# Altium PCB Arduino_Leonardo-REV3b.PcbDoc
Units mil, origin at the board's own origin, x right, y up, seen from the top; angles counter-clockwise.
Board outline 2700 x 2100 mil, 2 copper layers (Top, Bottom), stack 61.811 mil thick; 51 components, 53 nets, 275 pads, 91 vias.
Unrouted connection lines stored in the file: 3.
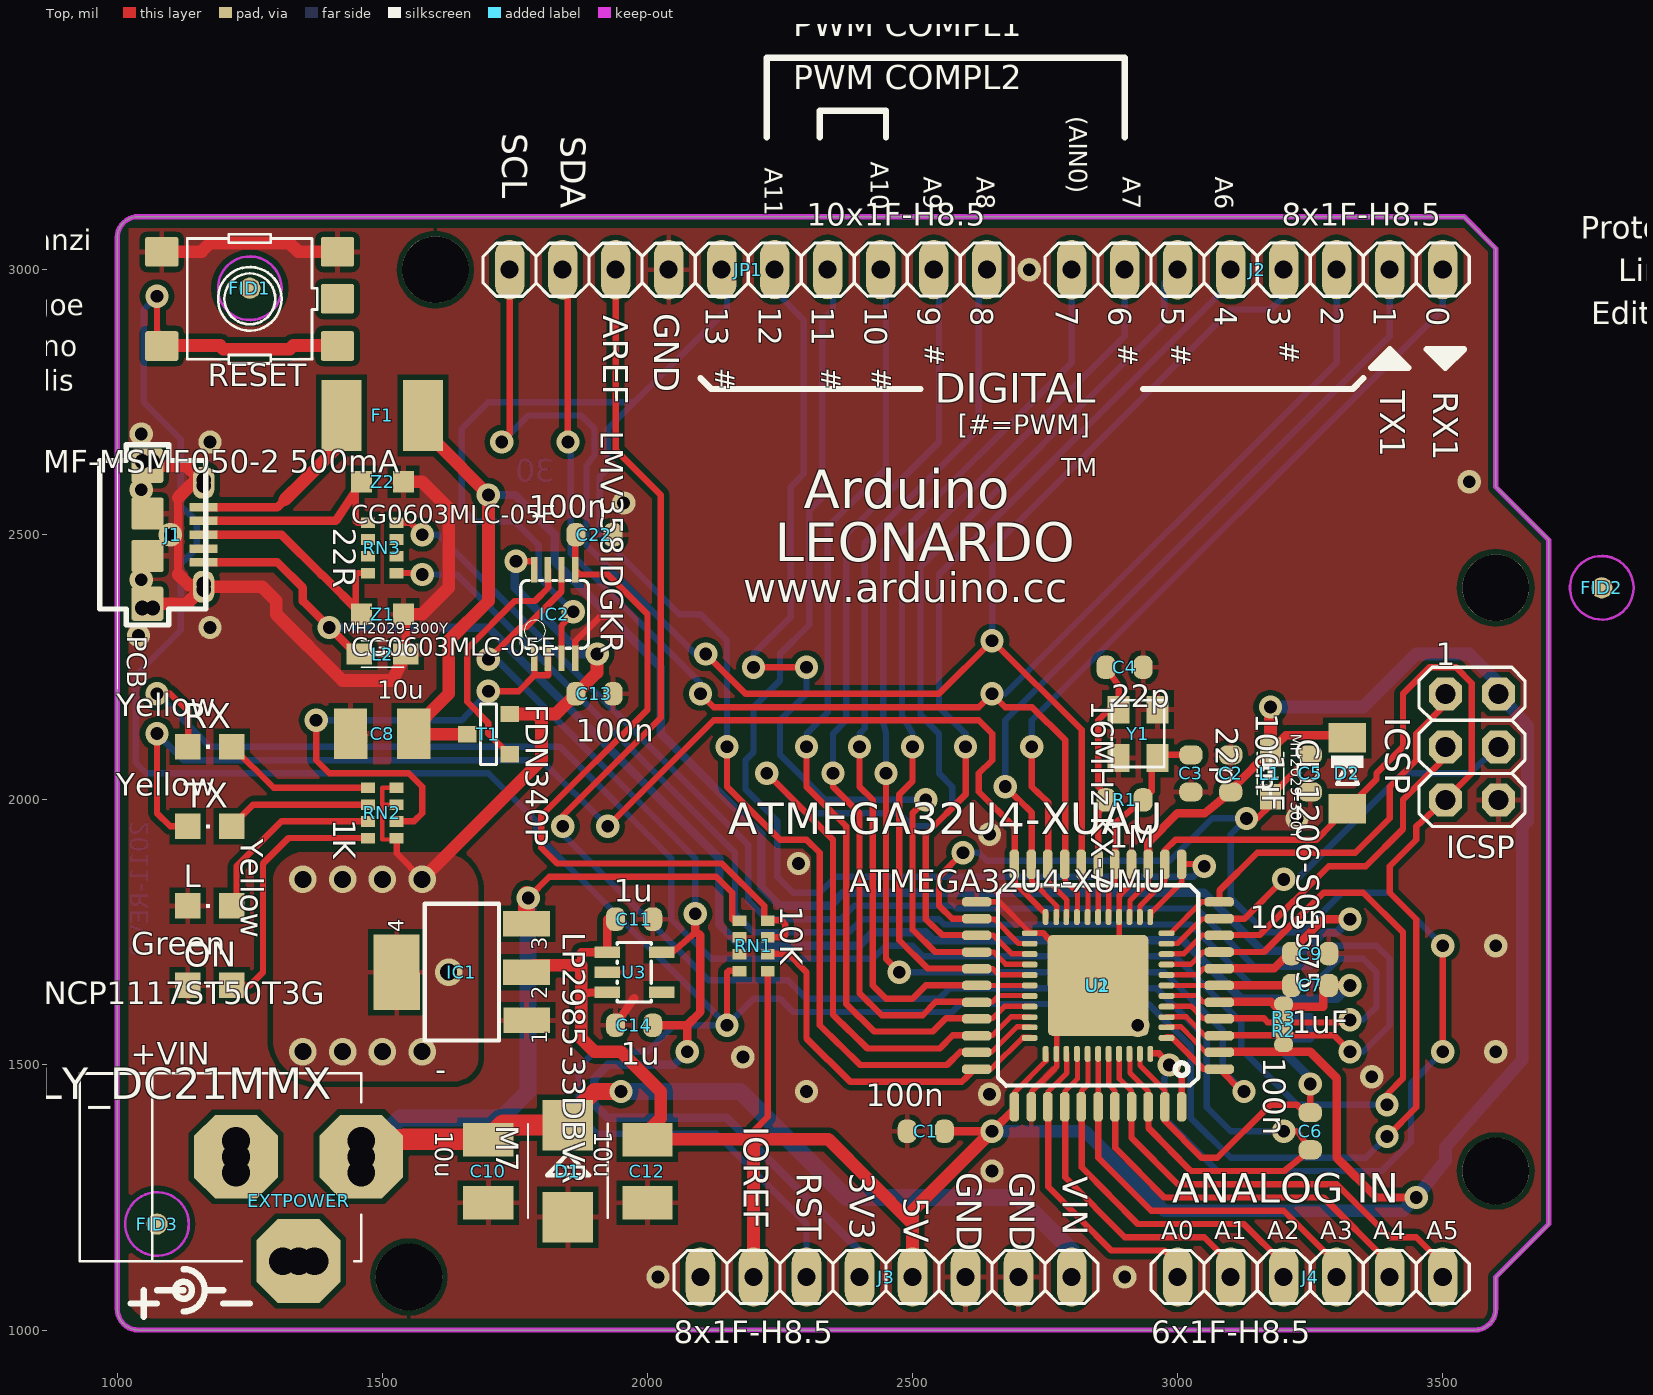
[diagram p0: Top view]
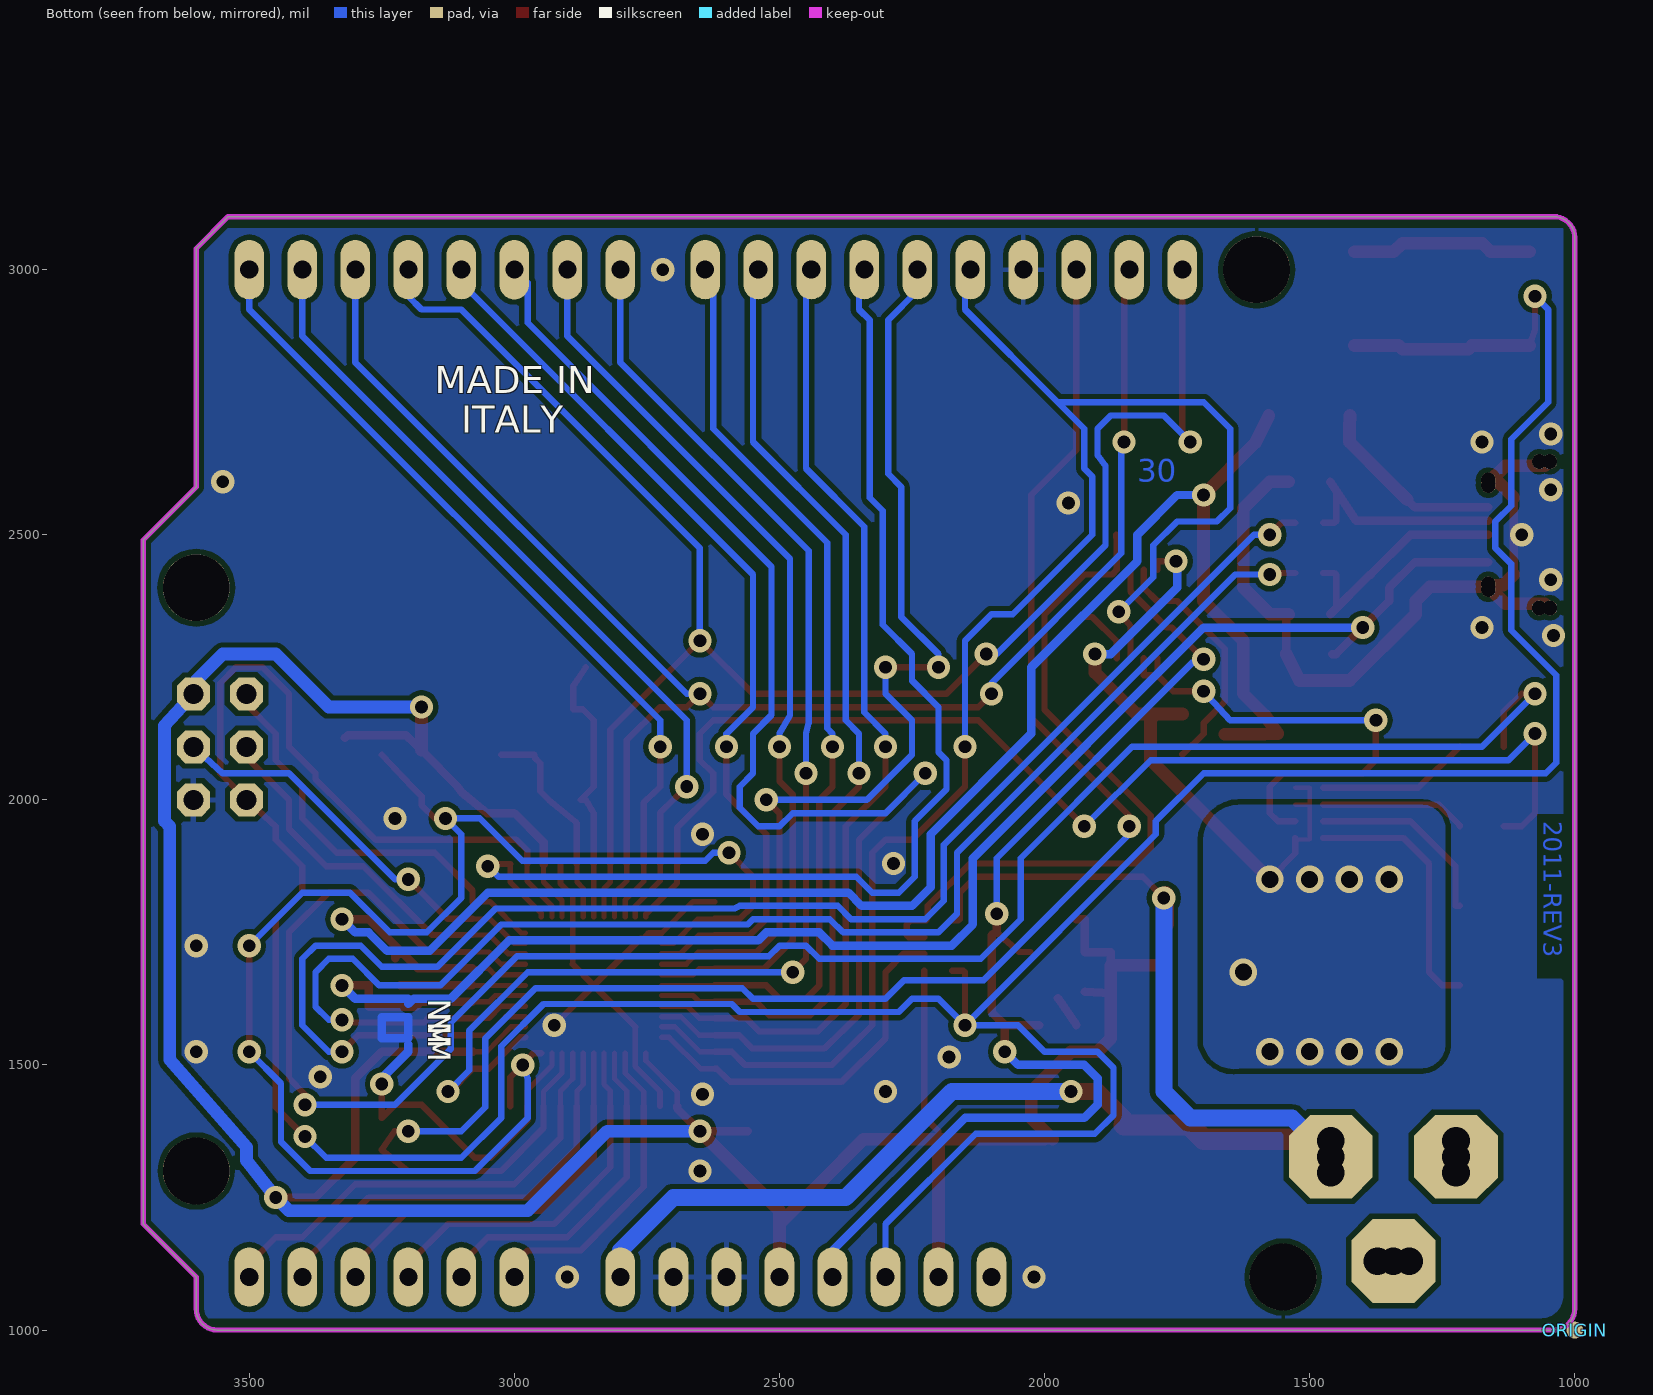
[diagram p1: Bottom view, seen from below]

## Layer stack, top to bottom
Top Solder: solder mask 0.4, Solder Resist, Dk 3.5
Top: signal copper 1.378
Dielectric 1: core 59.0551, FR-4, Dk 4.8
Bottom: signal copper 1.378
Bottom Solder: solder mask 0.4, Solder Resist, Dk 3.5

## Board outline
1040,3100 3540,3100 3600,3040 3600,2590 3700,2490 3700,1200 3600,1100 3600,1040 cw(c3560.5,1039.5) 3561,1000 1040,1000 cw(c1040,1040) 1000,1040 1000,3061 cw(c1039.5,3060.5)

## Design rules (kind name [scope] priority, off if disabled: settings)
Clearance [All] p1: gap=10 except(0: SMDPad-SMDPad SMDPad-THPad SMDPad-Via; 8: THPad-THPad; 12: THPad-Via Via-Via)
Clearance "Clearance (Same Net)" [All] p2: gap=0 except(8: SMDPad-SMDPad SMDPad-THPad SMDPad-Via)
HoleSize HoleSize_1 [All] p1: absolutevalues=TRUE maxlimit=100000 minlimit=22 maxpercent=80.000 minpercent=20.000
HoleSize [All] p2: absolutevalues=TRUE maxlimit=100 minlimit=1 maxpercent=80.000 minpercent=20.000
HoleToHoleClearance mdViaViaSameLayer [All] p1: gap=8 allowstackedmicrovias=TRUE
HoleToHoleClearance [All] p2: gap=10 allowstackedmicrovias=TRUE
PasteMaskExpansion mlMinCreamFrame [All] p1: expansion=-20
PasteMaskExpansion [All] p2: expansion=0
PolygonConnect ThermalVias [IsVia] p1: connectstyle=Direct reliefconductorwidth=10 reliefentries=4 polygonreliefangle="90 Angle" airgapwidth=10
PolygonConnect [All] p2: connectstyle=Relief reliefconductorwidth=10 reliefentries=4 polygonreliefangle="90 Angle" airgapwidth=10
RoutingVias [All] p1: holewidth=28 width=50 viastyle="Through Hole" minholewidth=28 minwidth=50 maxholewidth=28 maxwidth=50
SilkToSilkClearance [All] p1 off: silktosilkclearance=10
SilkToSolderMaskClearance [IsPad] p1 off: minsilkscreentomaskgap=10 clearancetoexposedcopper=TRUE
SolderMaskExpansion mlMinStopFrame [All] p1: expansion=2
SolderMaskExpansion [All] p2: expansion=4
Width Width_1 [All] p1: maxlimit=100000 minlimit=10 preferedwidth=10
Width [All] p2: maxlimit=10 minlimit=10 preferedwidth=10
25 further rules are at their usual default settings.

## Components (designator, comment, footprint, x,y, rotation, side; value= is the part's Value field where it differs from the comment)
C1 "100n" C0603-ROUND 2525,1375 r180.01 top
C2 "100n" C0603-ROUND 3100,2050 r90.02 top
C3 "22p" C0603-ROUND 3025,2050 r90.02 top
C4 "22p" C0603-ROUND 2900,2250 r0 top
C5 "1uF" C0603-ROUND 3250,2050 r270 top
C6 "100n" C0603-ROUND 3250,1375 r270 top
C7 "1uF" C0603-ROUND 3250,1650 r0 top
C8 "10u" SMC_B 1500,2125 r180.01 top
C9 "100n" C0603-ROUND 3250,1710 r180.01 top
C10 "10u" SMC_B 1700,1300 r270 top
C11 "1u" C0603-ROUND 1975,1775 r180.01 top
C12 "10u" SMC_B 2000,1300 r270 top
C13 "100n" C0603-ROUND 1900,2200 r0 top
C14 "1u" C0603-ROUND 1975,1575 r0 top
C22 "100n" C0603-ROUND 1900,2500 r180.01 top
D1 "M7" SMB 1850,1300 r270 top
D2 "CD1206-S01575" MINIMELF 3320,2050 r270 top
EXTPOWER "POWERSUPPLY_DC21MMX" POWERSUPPLY_DC-21MM 1210,1330 r90.02 top
F1 "MF-MSMF050-2 500mA" L1812 1500,2725 r180.01 top
FID1 "" FIDUCIA-MOUNT 1250,2965 r0 top
FID2 "" FIDUCIA-MOUNT 3800,2400 r0 top
FID3 "" FIDUCIA-MOUNT 1075,1200 r0 top
IC1 "NCP1117ST50T3G" SOT223 1650,1675 r90.02 top
IC2 "LMV358IDGKR" MSOP08 1825,2350 r0 top
ICSP "ICSP" 2X03 3555,2100 r270 top
J1 "" CON2_USB_MICRO_B_AT 1057,2500 r270 top
J2 "8x1F-H8.5" 1X08 3150,3000 r180.01 top
J3 "8x1F-H8.5" 1X08 2450,1100 r0 top
J4 "6x1F-H8.5" 1X06 3250,1100 r0 top
JP1 "10x1F-H8.5" 1X10 2190,3000 r180.01 top
L "Yellow" CHIPLED_0805 1175,1800 r90.02 top
L1 "MH2029-300Y" 0805 3175,2050 r270 top
L2 "MH2029-300Y" 0805 1500,2275 r0 top
ON "Green" CHIPLED_0805 1175,1650 r90.02 top
ORIGIN "" TP-SP 1000,1000 r0 top
R1 "1M" R0603-ROUND 2900,2000 r0 top
R2 "NM" R0402 3200,1564 r89.98 bottom
R3 "NM" R0402 3200,1589 r89.98 bottom
RESET "" TS42 1250,2945 r180.01 top
RN1 "10K" CAY16 2200,1725 r270 top
RN2 "1K" CAY16 1500,1975 r90.02 top
RN3 "22R" CAY16 1500,2475 r90.02 top
RX "Yellow" CHIPLED_0805 1175,2100 r90.02 top
T1 "FDN340P" SOT-23 1700,2125 r270 top
TX "Yellow" CHIPLED_0805 1175,1950 r90.02 top
U1 "ATMEGA32U4-XUMU" QFN44ML7X7 2850,1650 r180.01 top
U2 "ATMEGA32U4-XUAU" TQFP44-PAD 2850,1650 r180.01 top
U3 "LP2985-33DBVR" SOT23-DBV 1975,1675 r270 top
Y1 "16MHz KX-7" CRYSTAL-3.2-2.5 2925,2125 r270 top
Z1 "CG0603MLC-05E" CT/CN0603 1500,2350 r0 top
Z2 "CG0603MLC-05E" CT/CN0603 1500,2600 r0 top

## Footprints (in the part's own frame and the unit in brackets; to place one, negate y for a bottom-side part, rotate by r counter-clockwise, add the part's x,y. Pads: shape width x height; smd on the part's side, far side on the other; paste and mask are expansions set on the pad)
1X06 [mil] "1X06"
  oval 56x112 hole 34: 1(-250,0) 2(-150,0) 3(-50,0) 4(50,0) 5(150,0) 6(250,0)
  silkscreen extent -300,-50 300,50
1X08 [mil] "1X08"
  oval 56x112 hole 34: 1(-350,0) 2(-250,0) 3(-150,0) 4(-50,0) 5(50,0) 6(150,0) 7(250,0) 8(350,0)
  silkscreen extent -400,-50 400,50
1X10 [mil] "1X10"
  oval 56x112 hole 34: 1(-450,0) 2(-350,0) 3(-250,0) 4(-150,0) 5(-50,0) 6(50,0) 7(150,0) 8(250,0) 9(350,0) 10(450,0)
  silkscreen extent -500,-50 500,50
2X03 [mil] "2X03"
  oct 62x62 hole 38: 1(-100,-50) 2(-100,50) 3(0,-50) 4(0,50) 5(100,-50) 6(100,50)
  silkscreen extent -150,-100 150,100
0805 [mil] "0805"
  rect 48x40 smd: 1(-43.31,0) 2(44,0)
  silkscreen extent -51,-25 48,25
C0603-ROUND [mil] "C0603-ROUND"
  rrect80% 36x44 smd: 1(-35,0) 2(35,0)
CAY16 [mil] "CAY16"
  rect 20x26 smd: 1(-47.24,-26.57) 2(-15.75,-26.57) 3(16,-26.57) 4(48,-26.57) 5(48,27) 6(16,27) 7(-15.75,27) 8(-47.24,27)
CHIPLED_0805 [mil] "CHIPLED_0805"
  rect 48x48 smd: A(0,-41.34) C(0,42)
  silkscreen extent -4,0 4,8
CON2_USB_MICRO_B_AT [mil] "CON2_USB_MICRO_B_AT"
  round 28 hole 28: 1(-138,-10) 1(-138,10) 1(-103,106) 1(-93,106) 1(93,106) 1(103,106) 1(138,-10) 1(138,10)
  rrect10% 16x53 smd: P1(-52,106) P2(-26,106) P3(0,106) P4(26,106) P5(52,106)
  rrect20% 65x61 smd: S1(-130,0) S2(130,0)
  rrect80% 60x40 smd: S3(-98,106) S4(98,106)
  rrect10% 60x60 smd: S5(-40,0) S6(40,0)
  silkscreen extent -170,-90 290,110
CRYSTAL-3.2-2.5 [mil] "CRYSTAL-3.2-2.5"
  rect 52x42 smd: 1(-45.28,-36.42) 2(46,-36.42) 3(46,37) 4(-45.28,37)
  silkscreen extent -63,-49 63,50
CT/CN0603 [mil] "CT/CN0603"
  rect 40x40 smd: 1(-39.37,0) 2(40,0)
FIDUCIA-MOUNT [mil] "FIDUCIA-MOUNT"
  rrect100% 40x40 smd: P$1(0,0)
  Top keep-out circle w5: c0,0 r60
L1812 [mil] "L1812"
  rect 75x134 smd: 1(-76.77,0) 2(77,0)
MINIMELF [mil] "MINIMELF"
  rect 56x71 smd: A(67,0) C(-66.93,0)
  silkscreen extent -34,-31 20,31
MSOP08 [mil] "MSOP08"
  rect 12x48 smd: 1(-38.43,-83.19) 2(-12.83,-83.19) 3(13,-83.19) 4(39,-83.19) 5(39,84) 6(13,84) 7(-12.83,84) 8(-38.43,84)
  silkscreen extent -64,-64 64,64
POWERSUPPLY_DC-21MM [mil] "POWERSUPPLY_DC-21MM"
  oct 158x158 hole 52: 1(-200,-132) 2(-3,-250) 3(-3,-14)
  round 78 hole 52: 4(-200,-162) 5(-200,-102) 6(-33,-14) 7(27,-14) 8(-33,-250) 9(27,-250)
  silkscreen extent -200,-250 154,281
QFN44ML7X7 [mil] "QFN44ML7X7"
  rrect80% 30x11 smd: 1(-128.94,99) 2(-128.94,79) 3(-128.94,60) 4(-128.94,40) 5(-128.94,20) 6(-128.94,0) 7(-128.94,-19.69) 8(-128.94,-39.37) 9(-128.94,-59.06) 10(-128.94,-78.74) 11(-128.94,-98.43) 23(129,-98.43) 24(129,-78.74) 25(129,-59.06) 26(129,-39.37) 27(129,-19.68) 28(129,0) 29(129,20) 30(129,40) 31(129,60) 32(129,79) 33(129,99)
  rrect80% 11x30 smd: 12(-98.43,-128.94) 13(-78.74,-128.94) 14(-59.06,-128.94) 15(-39.37,-128.94) 16(-19.68,-128.94) 17(0,-128.94) 18(20,-128.94) 19(40,-128.94) 20(60,-128.94) 21(79,-128.94) 22(99,-128.94) 34(99,129) 35(79,129) 36(60,129) 37(40,129) 38(20,129) 39(0,129) 40(-19.69,129) 41(-39.37,129) 42(-59.06,129) 43(-78.74,129) 44(-98.43,129)
  rrect10% 190x190 smd: EXP(0,0)
R0402 [mil] "R0402"
  rrect90% 28x36 smd far side: 1(-25.59,0) 2(26,0)
R0603-ROUND [mil] "R0603-ROUND"
  rrect80% 36x44 smd: 1(-35,0) 2(35,0)
SMB [mil] "SMB"
  rect 95x95 smd: A(87,0) C(-86.61,0)
  silkscreen extent -89,-75 89,75
SMC_B [mil] "SMC_B"
  rect 63x95 smd: +(-59.06,0) -(60,0)
SOT23-DBV [mil] "SOT23-DBV"
  rect 22x48 smd: 1(-37.4,-51.18) 2(0,-51.18) 3(38,-51.18) 4(38,52) 5(-37.4,52)
  silkscreen extent -56,-32 56,32
SOT223 [mil] "SOT223"
  rect 48x88 smd: 1(-91,-122) 2(0,-122) 3(91,-122)
  rect 142x87 smd: 4(0,123)
  silkscreen extent -129,-70 129,70
SOT-23 [mil] "SOT-23"
  rect 31x35 smd: 1(1,-40) 2(-37,40) 3(39,40)
  silkscreen extent -56,-15 58,15
TP-SP [mil] "TP-SP"
  rrect100% 32x32 smd far side: X(0,0)
TQFP44-PAD [mil] "TQFP44-PAD"
  rrect80% 56x18 smd: 1(-228.35,158) 2(-228.35,126) 3(-228.35,95) 4(-228.35,63) 5(-228.35,32) 6(-228.35,0) 7(-228.35,-31.5) 8(-228.35,-62.99) 9(-228.35,-94.49) 10(-228.35,-125.98) 11(-228.35,-157.48) 23(229,-157.48) 24(229,-125.98) 25(229,-94.49) 26(229,-62.99) 27(229,-31.5) 28(229,0) 29(229,32) 30(229,63) 31(229,95) 32(229,126) 33(229,158)
  rrect80% 18x56 smd: 12(-157.48,-228.35) 13(-125.98,-228.35) 14(-94.49,-228.35) 15(-62.99,-228.35) 16(-31.5,-228.35) 17(0,-228.35) 18(32,-228.35) 19(63,-228.35) 20(95,-228.35) 21(126,-228.35) 22(158,-228.35) 34(158,229) 35(126,229) 36(95,229) 37(63,229) 38(32,229) 39(0,229) 40(-31.5,229) 41(-62.99,229) 42(-94.49,229) 43(-125.98,229) 44(-157.48,229)
  rrect100% 40x40 smd: P$1(0,0)
  silkscreen extent -189,-189 189,189
TS42 [mil] "TS42"
  rrect15% 63x56 smd: 1(-165.35,89) 2(166,89) 3(-165.35,-88.58) 4(166,-88.58) 5(-165.35,0)
  silkscreen extent -127,-122 118,122

## Part data
C1 C2 C3 C4 C5 C6 C7 C9 C11 C13 C14 C22: library part C0603-ROUND
C8 C10 C12: library part SMC_B
D1: library part SMB
D2: library part MINIMELF
EXTPOWER: library part POWERSUPPLY_DC-21MM
F1: library part L1812
FID1 FID2 FID3: library part FIDUCIA-MOUNT
IC1: library part SOT223
IC2: library part MSOP08
ICSP: library part 2X03
J1: library part CON2_USB_MICRO_B_AT
J2 J3: library part 1X08
J4: library part 1X06
JP1: library part 1X10
L ON RX TX: library part CHIPLED_0805
L1 L2: library part 0805
ORIGIN: library part TP-SP
R1: library part R0603-ROUND
R2 R3: library part R0402
RESET: library part TS42
RN1 RN2 RN3: library part CAY16
T1: library part SOT-23
U1: library part QFN44ML7X7
U2: library part TQFP44-PAD
U3: library part SOT23-DBV
Y1: library part CRYSTAL-3.2-2.5
Z1 Z2: library part CT/CN0603

## Free pads (board coordinates)
  round 126 hole 126: 1(1550,1100) 1(1600,3000) 1(3600,1300) 1(3600,2400)

## Via types
v1: diameter 44/44 (per signal layer), hole 24, Top to Bottom, 82 vias
v2: diameter 52/52 (per signal layer), hole 32, Top to Bottom, 9 vias

## Nets (pads, with @x,y where several pads share a name; then routed paths per layer and width w, separated by ;. In a path a pad name is that pad's centre, name@x,y a point inside that pad or via, vN(x,y) a via of type N, cw(c..) or ccw(c..) an arc to the next point about the centre after c; other vN are vias at no path point)
5-GND: RESET.5
+3V3: C14.2 IC2.6 J3.4 U3.5 | length 2210.5
  Top w12: v1(1700,2265) 1760,2325 1770,2325 1838,2393 IC2.6 ; U3.5@2027,1713 2048,1713 2090,1750
  Top w16: C14.2 2075,1575 ; v1(2075,1525) 2075,1575 ; v1(2090,1785) 2090,1750 2100,1745 2100,1600 2075,1575
  Bottom w12: v1(1700,2265) 1705,2265 1710,2260 1720,2260 2090,1890 v1(2090,1785)
  Bottom w16: v1(2075,1525) 2050,1500 1925,1500 1900,1475 1900,1425 1925,1400 2150,1400 2400,1150 J3.4
+5V: C1.1 C2.1 C11.2 C12.+ C13.1 D2.C IC1.2 IC1.4 IC2.8 ICSP.2 J3.2 J3.5 L1.1 RN1.5 RN2.1 RN2.3 RN2.4 T1.2 U1.2 U1.14 U1.34 U2.2 U2.14 U2.34 U3.1 U3.3 | length 7583.9
  Top w8: RN2.1@1524,1925 1500,1925 1500,1991 ; RN2.3@1527,1991 1500,1991 ; RN2.4@1527,2023 1500,2023 1500,1991
  Top w10: U2.34@2693,1422 2693,1449 2752,1508 U1.34@2752,1522 ; U1.14@2910,1779 2910,1810 2945,1845 U2.14@2945,1879 ; U1.2@2979,1572 3006,1572 3052,1525 U2.2@3078,1525
  Top w12: RN2.1@1524,1925 1527,1928 1527,1899 v2(1575,1850) ; v1(1752,2450) 1787,2450 IC2.8@1787,2434 ; 2200,1360 2200,1375 2227,1402 RN1.5@2227,1678 ; U2.2@3078,1525 U2.2@3079,1525
  Top w16: 1875,1635 U3.3@1924,1638 ; 1875,1688 1875,1713 1924,1713 1924,1775 C11.2 ; C12.+@1985,1360 C12.+@2000,1360 ; C1.1 v1(2650,1375) 2693,1418 U2.34@2693,1422 ; U2.14@2945,1879 2945,1920 3000,1975 3051,1975 C2.1 3107,2025 3175,2094 3204,2122 3314,2122 3315,2120 D2.C@3320,2117 ; U2.2@3078,1525 3250,1525 3300,1475 3300,1325 3375,1250 v1(3450,1250)
  Top w24: v2(1575,1850) 1800,2075 1800,2152 1790,2162 ; T1.2 1790,2162 ; IC1.2 1785,1688 1875,1688 1875,1635 1875,1550 1900,1525 1950,1525 2025,1450 2025,1400 C12.+@1985,1360 ; v1(1905,2275) 1905,2240 C13.1 1827,2162 1790,2162 ; C12.+@2000,1360 2200,1360 ; J3.2 2200,1360 ; J3.5 2500,1200 ; v1(2650,1375) 2500,1225 2500,1200 ; L1.1@3175,2094 v1(3175,2175) ; 2200,1360 2341,1360 2500,1200
  Bottom w16: v1(1752,2450) 1750,2439 1750,2400 1875,2275 v1(1905,2275)
  Bottom w24: v1(2650,1375) 2825,1375 2975,1225 3425,1225 v1(3450,1250) 3505,1320 3505,1345 3650,1510 3650,1950 3660,1960 3660,2140 ICSP.2 3600,2225 3550,2275 3450,2275 3350,2175 v1(3175,2175)
  other v2: 1350,1525 1425,1525 1500,1525 1575,1525 1625,1675 1350,1850 1425,1850 1500,1850
A0: J4.1 U1.36 U2.36 | length 595.9
  Top w10: U2.36@2756,1422 2756,1450 2791,1485 U1.36@2791,1522
  Top w12: U2.36@2756,1422 2756,1270 2875,1150 2975,1150 3000,1125 J4.1
A1: J4.2 U1.37 U2.37 | length 648.3
  Top w10: U2.37@2788,1422 2788,1451 2811,1474 U1.37@2811,1522
  Top w12: U2.37@2788,1422 2788,1288 2900,1175 3050,1175 3100,1125 J4.2
A2: J4.3 U1.38 U2.38 | length 701.7
  Top w10: U2.38@2819,1422 2819,1451 2831,1463 U1.38@2831,1522
  Top w12: U2.38@2819,1422 2819,1307 2925,1200 3125,1200 3200,1125 J4.3
A3: J4.4 U1.39 U2.39 | length 754.8
  Top w10: U2.39@2850,1422 U1.39@2850,1522
  Top w12: U2.39@2850,1422 2850,1325 2950,1225 3200,1225 3300,1125 J4.4
A4: J4.5 U1.40 U2.40 | length 817
  Top w10: U1.40@2870,1522 2870,1463 2882,1451 U2.40@2882,1422
  Top w12: U2.40@2882,1422 2882,1344 2975,1250 3275,1250 3400,1125 J4.5
A5: J4.6 U1.41 U2.41 | length 879.4
  Top w10: U1.41@2890,1522 2890,1474 2913,1451 U2.41@2913,1422
  Top w12: U2.41@2913,1422 2913,1363 3000,1275 3300,1275 3400,1175 3450,1175 3500,1125 J4.6
AGND: C6.1 R2.1 U1.43 U2.43 | length 661.2
  Top w10: U1.43@2929,1522 2929,1499 2976,1452 U2.43@2976,1422
  Top w12: U2.43@2976,1422 2976,1395 3045,1325 3075,1325 3175,1425 3225,1425 3250,1400 C6.1 v1(3250,1464)
  Bottom w16: 3200,1539 3200,1525 3250,1475 v1(3250,1464)
AREF: C6.2 JP1.8 U1.42 U2.42 | length 3438.6
  Top w10: U1.42@2910,1522 2910,1485 2945,1450 U2.42@2945,1422
  Top w12: v1(1840,1950) 1840,1970 2025,2155 2025,2575 1940,2660 JP1.8 ; U2.42@2945,1422 2945,1381 3025,1300 3201,1300 C6.2 3226,1375 v1(3200,1375)
  Bottom w12: v1(1840,1950) 1840,1935 2115,1660 2265,1660 2300,1625 2550,1625 2570,1645 2960,1645 3055,1550 3055,1420 3100,1375 v1(3200,1375)
AVCC: C5.1 L1.2 U1.24 U1.44 U2.24 U2.44 | length 2895.5
  Top w10: U2.24@2622,1776 2623,1775 2654,1775 2700,1729 2716,1729 U1.24@2722,1729
  Top w12: v1(2595,1900) 2550,1855 2550,1800 2575,1776 U2.24@2622,1776 ; U1.44@2949,1522 2965,1522 v1(2984,1500) 3008,1477 U2.44@3008,1422 ; v1(3130,1965) 3150,1965 3175,1990 3175,2007 3193,2025 C5.1 ; v1(3500,1525) v1(3500,1725)
  Bottom w12: v1(2595,1900) 2625,1900 2640,1885 2985,1885 3065,1965 v1(3130,1965) 3100,1935 3100,1815 3165,1750 3235,1750 3310,1825 3400,1825 v1(3500,1725) ; v1(2984,1500) 2975,1475 2975,1400 3075,1300 3385,1300 3440,1355 3440,1465 v1(3500,1525)
CMP: C22.2 IC2.5 RN1.7 RN1.8 | length 1351.4
  Top w12: C22.2 1865,2495 1864,2494 IC2.5 1872,2425 1925,2425 2000,2350 2000,2170 1800,1970 1800,1910 1830,1880 2140,1880 2220,1800 2220,1779 RN1.8@2227,1773 ; RN1.8@2223,1773 RN1.8@2227,1773 ; RN1.7@2227,1741 2256,1741 2260,1745 2260,1765 2253,1773 RN1.8@2227,1773
D0/RX: J2.1 U1.20 U2.20 | length 1569.7
  Top w10: U2.20@2756,1879 2756,1846 2791,1811 U1.20@2791,1779
  Top w12: v1(2725,2100) 2725,2025 2756,1995 U2.20@2756,1879
  Bottom w12: v1(2725,2100) 2725,2150 3500,2925 J2.1@3500,3000
D1/TX: J2.2 U1.21 U2.21 | length 1561.8
  Top w10: U2.21@2725,1879 2725,1847 2772,1800 U1.21@2772,1779
  Top w12: v1(2675,2025) 2725,1976 U2.21@2725,1879
  Bottom w12: v1(2675,2025) 2675,2150 3400,2875 J2.2
D2/SDA: J2.3 JP1.9 U1.19 U2.19 | length 3079.6
  Top w10: U2.19@2788,1879 2788,1847 2811,1824 U1.19@2811,1779
  Top w12: JP1.9@1840,3000 1850,2990 v1(1850,2675) ; v1(2100,2200) 2125,2175 2625,2175 v1(2650,2200) 2675,2175 2725,2175 2788,2113 U2.19@2788,1879
  Bottom w12: v1(1850,2675) 1850,2670 1855,2665 1855,2465 2100,2220 v1(2100,2200) ; v1(2650,2200) 2675,2200 3300,2825 J2.3
D3/SCL: J2.4 JP1.10 U1.18 U2.18 | length 3252.7
  Top w10: U2.18@2819,1879 2819,1845 2831,1833 U1.18@2831,1779
  Top w12: v1(1725,2675) 1740,2690 JP1.10@1740,3000 ; v1(2110,2275) 2185,2200 2550,2200 v1(2650,2300) 2819,2132 U2.18@2819,1879
  Bottom w12: v1(1725,2675) 1775,2725 1875,2725 1900,2700 1900,2650 1885,2630 1885,2480 2090,2275 v1(2110,2275) ; v1(2650,2300) 2650,2475 3100,2925 3175,2925 3200,2950 J2.4
D4: J2.5 U1.25 U2.25 | length 1728.2
  Top w10: U2.25@2622,1745 2652,1745 2687,1710 U1.25@2722,1710
  Top w12: v1(2600,2100) 2600,2010 2525,1935 2525,1775 2556,1745 U2.25@2622,1745
  Bottom w12: v1(2600,2100) 2600,2125 2550,2175 2550,2425 3100,2975 J2.5
D5*: J2.6 U1.31 U2.31 | length 2576.5
  Top w10: U2.31@2622,1556 2651,1556 2686,1591 U1.31@2722,1591
  Top w12: v1(2225,2050) 2350,1925 2350,1595 2415,1531 2551,1531 2576,1556 U2.31@2622,1556
  Bottom w12: v1(2225,2050) 2300,1975 2475,1975 2500,1950 2540,1950 2575,1985 2575,2025 2550,2050 2550,2125 2515,2160 2515,2440 2975,2900 2975,2975 J2.6
D6*: J2.7 U1.27 U2.27 | length 1728.3
  Top w10: U2.27@2622,1682 2651,1682 2663,1670 U1.27@2722,1670
  Top w12: v1(2500,2100) 2500,2035 2475,2010 2475,1735 2529,1682 U2.27@2622,1682
  Bottom w12: v1(2500,2100) 2500,2125 2480,2160 2480,2455 2900,2875 J2.7
D7: J2.8 U1.1 U2.1 | length 2458.7
  Top w12: v1(2450,2050) 2450,1700 v1(2475,1675) ; U1.1@2979,1552 2989,1552 3048,1493 3079,1493 3121,1450 v1(3125,1450)
  Bottom w12: v1(2450,2050) 2450,2125 2445,2145 2445,2470 2800,2825 J2.8@2800,3000 ; v1(2475,1675) 2975,1675 3085,1565 3085,1490 v1(3125,1450)
D+: J1.P3 RN3.8 Z1.1 | length 464
  Top w12: Z1.1@1461,2350 1450,2365 1450,2425 1453,2428 RN3.8@1474,2428
  Top w16: J1.P3 1310,2500 1385,2425 1386,2425 Z1.1@1461,2350
D-: J1.P2 RN3.5 Z2.1 | length 441.2
  Top w12: Z2.1@1461,2600 1450,2586 1450,2525 1453,2523 RN3.5@1474,2523
  Top w16: J1.P2 1412,2526 Z2.1@1461,2600
GATE_CMD: IC2.7 T1.3 | length 467.4
  Top w12: T1.3 1739,2086 1700,2125 1700,2145 1660,2185 1660,2285 1750,2375 1788,2375 1813,2400 IC2.7@1813,2434
GND: C1.2 C2.2 C3.1 C4.2 C5.2 C8.- C9.1 C10.- C11.1 C12.- C13.2 C14.1 C22.1 D1.A EXTPOWER.1 EXTPOWER.3 IC1.1 IC2.4 ICSP.6 J1.S1 J1.S2 J1.S3 J1.S4 J1.S5 J1.S6 J3.6 J3.7 JP1.7 L2.2 L.C ON.C R2.2 R3.1 RESET.3 RESET.4 RN1.2 RN1.3 U1.15 U1.23 U1.35 U1.EXP U2.15 U2.23 U2.35 U2.P$1 U3.2 Y1.2 Y1.4 Z1.2 Z2.2 | length 3071.5
  Top w10: U2.23@2622,1808 2663,1808 U1.23@2722,1749
  Top w11: U1.23@2722,1749 2746,1749 ; U2.35@2725,1422 2725,1450 2772,1497 2772,1522 U1.EXP@2772,1572 ; U1.EXP@2890,1690 2890,1779 2890,1819 2913,1842 U2.15@2913,1879
  Top w12: J1.S4@1160,2405 J1.S4 ; IC2.4@1864,2267 1864,2299 1910,2345 1925,2345 ; 2746,1749 2756,1738 2762,1738 U2.P$1 ; U1.EXP@2772,1572 U2.P$1 ; U1.EXP@2890,1690 U2.P$1 ; v1(2925,1575) U2.P$1
  Top w16: 1115,2425 1115,2570 ; Z1.2 1544,2347 L2.2 ; C14.1 1975,1626
  Top w24: J1.S2 1131,2370 J1.S4 1273,2402 1300,2375 1300,2350 1425,2225 1519,2225 L2.2 ; J1.S1 1131,2630 J1.S3 1143,2598 1115,2570 ; RESET.4@1085,3034 1159,3034 1175,3050 1325,3050 1342,3034 RESET.3@1416,3034 ; 1115,2425 1135,2405 J1.S4@1160,2405 ; Z1.2 1575,2350 1625,2400 1625,2550 1575,2600 Z2.2
  Bottom w16: 3200,1550 3200,1564 3200,1590 3250,1590 3250,1550 3200,1550
  other v1: 2020,1100 2900,1100 2650,1300 2645,1445 2300,1450 3366,1478 2180,1515 3600,1525 3600,1725 2285,1880 2645,1935 3225,1965 1040,2310 1175,2325 1045,2415 1100,2500 1955,2560 1045,2585 3550,2600 1175,2675 1045,2690 2720,3000
HWB: RN1.6 U1.33 U2.33 | length 703.3
  Top w10: U2.33@2622,1493 2649,1493 2708,1552 U1.33@2722,1552
  Top w12: RN1.6@2227,1710 2266,1710 2300,1675 2300,1550 2383,1468 2593,1468 2600,1475 2618,1493 U2.33@2622,1493
IO8: JP1.1 U1.28 U2.28 | length 1777.5
  Top w10: U2.28@2622,1650 U1.28@2722,1650
  Top w12: v1(2400,2100) 2400,2025 2425,2000 2425,1650 2450,1625 2500,1625 2525,1650 U2.28@2622,1650
  Bottom w12: v1(2400,2100) 2400,2125 2410,2135 2410,2485 2625,2700 2625,2985 JP1.1@2640,3000
IO9*: JP1.2 U1.29 U2.29 | length 1826.7
  Top w10: U2.29@2622,1619 2651,1619 2663,1631 U1.29@2722,1631
  Top w12: v1(2350,2050) 2350,2025 2400,1975 2400,1635 2442,1594 2519,1594 2544,1619 U2.29@2622,1619
  Bottom w12: v1(2350,2050) 2350,2125 2375,2150 2375,2500 2550,2675 2550,2990 JP1.2@2540,3000
IO10*: JP1.3 U1.30 U2.30 | length 1899.6
  Top w10: U2.30@2622,1588 2651,1588 2674,1611 U1.30@2722,1611
  Top w12: v1(2300,2100) 2300,2025 2375,1950 2375,1615 2428,1563 2538,1563 2563,1588 U2.30@2622,1588
  Bottom w12: v1(2300,2100) 2300,2125 2340,2165 2340,2515 2450,2625 2450,2965 JP1.3@2440,2975 ; JP1.3 JP1.3@2440,2975 ; JP1.3@2450,2950 2440,2960 JP1.3@2440,2975
IO11*: JP1.4 U1.12 U2.12 | length 2256.6
  Top w10: U1.12@2949,1779 2949,1786 3008,1845 U2.12@3008,1879
  Top w12: U2.12@3008,1879 3054,1879 v1(3050,1875)
  Bottom w12: JP1.4 2350,2990 2350,2925 2330,2905 2330,2570 2305,2545 2305,2330 2250,2275 2250,2225 2200,2175 2200,2090 2185,2075 2185,2020 2245,1960 2245,1855 2275,1825 2325,1825 2355,1855 3030,1855 v1(3050,1875)
IO12: JP1.5 U1.26 U2.26 | length 1912
  Top w10: U2.26@2622,1713 2653,1713 2676,1690 U1.26@2722,1690
  Top w12: v1(2200,2250) v1(2300,2250) ; v1(2525,2000) 2500,1975 2500,1755 2543,1713 U2.26@2622,1713
  Bottom w12: v1(2200,2250) 2200,2275 2270,2345 2270,2590 2295,2615 2295,2905 2240,2960 JP1.5 ; v1(2300,2250) 2300,2200 2250,2150 2250,2085 2335,2000 v1(2525,2000)
IO13*: IC2.3 JP1.6 U1.32 U2.32 | length 3128.2
  Top w10: U2.32@2622,1525 2650,1525 2697,1572 U1.32@2722,1572
  Top w12: IC2.3@1838,2267 1838,2328 v1(1860,2355) ; v1(2150,2100) 2150,2025 2250,1925 2300,1925 2325,1900 2325,1575 2401,1500 2565,1500 2590,1525 U2.32@2622,1525
  Bottom w12: v1(1860,2355) 1795,2420 1795,2480 1750,2525 1675,2525 1650,2550 1650,2700 1700,2750 1975,2750 ; JP1.6 2150,2990 2150,2925 1975,2750 ; v1(2150,2100) 2150,2300 2100,2350 2060,2350 1910,2500 1910,2610 1925,2625 1925,2700 1975,2750
LL: IC2.1 IC2.2 RN2.2 | length 938.7
  Top w12: v1(1375,2150) 1375,2075 1400,2050 1550,2050 1575,2025 1575,1975 1560,1960 RN2.2@1527,1960 ; v1(1700,2205) 1757,2205 1787,2235 ; IC2.1@1787,2267 1787,2235 ; IC2.2@1813,2267 1813,2235 1787,2235
  Bottom w12: v1(1375,2150) 1650,2150 v1(1700,2205)
MISO: ICSP.1 U1.11 U2.11 | length 801.3
  Top w10: U1.11@2979,1749 2987,1749 3046,1808 U2.11@3079,1808
  Top w12: U2.11@3079,1808 3079,1829 3150,1900 3335,1900 3400,1965 3400,2025 3450,2075 3450,2125 3505,2180 ICSP.1
MOSI: ICSP.4 U1.10 U2.10 | length 777.9
  Top w10: U1.10@2979,1729 3000,1729 3046,1775 U2.10@3079,1776
  Top w12: U2.10@3079,1776 3126,1776 v1(3200,1850)
  Bottom w12: v1(3200,1850) 3225,1850 3425,2050 3550,2050 ICSP.4
N$2: L.A RN2.7 | length 367.2
  Top w12: L.A@1217,1800 1225,1800 1225,1875 1310,1960 RN2.7@1474,1960
N$3: ON.A RN2.8 | length 492.2
  Top w12: ON.A@1217,1650 1250,1650 1275,1675 1275,1880 1323,1928 RN2.8@1474,1928
N$6: RN2.6 TX.A | length 275.2
  Top w12: TX.A@1217,1950 1217,1952 1256,1991 RN2.6@1474,1991
N$8: RN2.5 RX.A | length 288.6
  Top w12: RX.A@1217,2100 1295,2023 RN2.5@1474,2023
RD+: RN3.1 U1.4 U2.4 | length 2779.2
  Top w10: U1.4@2979,1611 3025,1611 3048,1588 U2.4@3079,1588
  Top w12: RN3.1@1527,2428 1573,2428 v1(1575,2425) ; U2.4@3079,1588 3163,1588 3170,1580 3320,1580 v1(3325,1585) v1@3323,1583
  Bottom w12: v1(1575,2425) 1640,2425 2165,1900 2165,1785 2200,1750 2380,1750 2405,1775 2550,1775 2560,1765 3025,1765 3140,1650 3255,1650 3305,1700 3350,1700 3375,1675 3375,1610 3350,1585 v1(3325,1585)
RD-: RN3.4 U1.3 U2.3 | length 2923
  Top w10: U1.3@2979,1591 3016,1591 3051,1556 U2.3@3079,1556
  Top w12: RN3.4@1527,2523 1553,2523 v1(1575,2500) ; U2.3@3079,1556 3295,1556 v1(3325,1525)
  Bottom w12: v1(1575,2500) 1605,2500 2190,1915 2190,1810 2225,1775 2365,1775 2390,1800 2575,1800 2585,1795 3035,1795 3145,1685 3250,1685 3290,1725 3375,1725 3400,1700 3400,1575 3350,1525 v1(3325,1525)
RESET: D2.A ICSP.5 J3.3 RESET.1 RESET.2 RN1.4 U1.13 U2.13 | length 7296.5
  Top w10: U1.13@2929,1779 2929,1800 2976,1847 U2.13@2976,1879
  Top w12: v1(1075,2950) 1075,2887 RESET.2@1085,2857 ; v1(2150,1575) 2150,1675 2153,1678 RN1.4@2174,1678 ; U2.13@2976,1879 2976,1905 2996,1925 3262,1925 3320,1984 3375,2039 3375,2050 3425,2100 3425,2200 3475,2250 3525,2250 3555,2220 3555,2050 ICSP.5 3450,1950 3450,1925 3400,1875 3400,1825 3450,1775 3450,1420 v1(3395,1365)
  Top w24: RESET.2@1085,2857 1194,2857 1200,2850 1325,2850 1332,2857 RESET.1@1416,2857
  Bottom w12: v1(1075,2950) 1050,2925 1050,2750 1120,2680 1120,2555 1150,2525 1150,2475 1120,2445 1120,2320 1035,2235 1035,2070 1055,2050 1700,2050 1790,1960 1790,1935 v1(2150,1575) ; J3.3 2300,1200 2130,1370 1905,1370 1870,1405 1870,1495 1900,1525 2000,1525 2050,1575 v1(2150,1575) ; v1(3395,1365) 3355,1325 3100,1325 3025,1400 3025,1535 2945,1615 2590,1615 2575,1600 2275,1600 2250,1625 2200,1625 v1(2150,1575)
RXLED: RX.C U1.8 U2.8 | length 3768.2
  Top w10: U1.8@2979,1690 3025,1690 3048,1713 U2.8@3079,1713
  Top w12: v1(1075,2200) 1100,2200 1134,2167 RX.C@1134,2100 ; U2.8@3079,1713 3163,1713 3275,1825 3350,1825 3425,1750 3425,1475 3395,1445 v1(3395,1425)
  Bottom w12: v1(1075,2200) 1175,2100 1835,2100 2045,1890 2045,1775 2120,1700 2425,1700 2450,1725 2500,1725 2520,1705 2995,1705 3120,1580 3120,1530 3225,1425 v1(3395,1425)
SCK: ICSP.3 U1.9 U2.9 | length 731.5
  Top w10: U1.9@2979,1710 3012,1710 3047,1745 U2.9@3079,1745
  Top w12: U2.9@3079,1745 3155,1745 3285,1875 3355,1875 3425,1945 3425,2000 3505,2080 ICSP.3
TXLED: TX.C U1.22 U2.22 | length 2376.4
  Top w10: U1.22@2752,1779 U1.22@2752,1784
  Top w11: U2.22@2693,1879 2693,1843 2735,1801 U1.22@2752,1784
  Top w12: v1(1075,2125) 1075,1975 1100,1950 TX.C@1134,1950 ; v1(1925,1950) 2125,2150 2625,2150 2650,2125 2650,2075 2625,2050 2625,2015 2693,1948 U2.22@2693,1879 ; 2735,1801 2740,1796
  Bottom w12: v1(1075,2125) 1125,2075 1800,2075 v1(1925,1950)
UCAP: C7.1 U1.6 U2.6 | length 236
  Top w10: U1.6@2979,1650 U2.6@3079,1650
  Top w16: U2.6@3079,1650 C7.1
UGND: C7.2 J1.P5 L2.1 R3.2 U1.5 U2.5 | length 3108.7
  Top w10: U1.5@2979,1631 3036,1631 3048,1619 U2.5@3079,1619
  Top w16: J1.P5 1302,2448 1350,2400 1350,2375 v1(1400,2325) 1450,2275 L2.1@1457,2275 ; U2.5@3079,1619 3177,1619 3185,1610 3275,1610 3275,1650 C7.2 v1(3325,1650)
  Bottom w16: v1(1400,2325) 1700,2325 2135,1890 2135,1765 2175,1725 2400,1725 2425,1750 2525,1750 2540,1735 3010,1735 3120,1625 3190,1625 3200,1615 3200,1625 3300,1625 v1(3325,1650)
USBID: J1.P4
VIN: C10.+ D1.C EXTPOWER.2 IC1.3 J3.8 RN1.1 | length 2917.5
  Top w12: v1(1775,1815) 1815,1855 2130,1855 2160,1825 2160,1775 2163,1773 RN1.1@2174,1773
  Top w16: IC1.3 1775,1769 v1(1775,1815)
  Top w32: IC1.3 1772,1822 v1(1775,1815) ; D1.C@1850,1387 1850,1400 1900,1450 v1(1950,1450)
  Top w40: EXTPOWER.2@1460,1327 1492,1359 1541,1360 C10.+@1700,1360 ; C10.+@1678,1360 C10.+@1700,1360 ; D1.C@1850,1387 1728,1387 C10.+@1700,1360
  Bottom w32: EXTPOWER.2@1460,1327 1533,1400 1725,1400 1775,1450 v1(1775,1815) ; v1(1950,1450) 2175,1450 2375,1250 2700,1250 2800,1150 J3.8
VUSB: C8.+ C9.2 F1.1 T1.1 U1.7 U2.7 | length 3434.6
  Top w10: U1.7@2979,1670 3037,1670 3049,1682 U2.7@3079,1682
  Top w12: C9.2 C9.2@3225,1701
  Top w16: U2.7@3079,1682 3182,1682 C9.2@3225,1725 ; C9.2 C9.2@3225,1725 ; C9.2@3225,1701 C9.2@3225,1725 ; v1(3325,1775) 3275,1775 C9.2@3225,1725
  Top w24: F1.1@1577,2725 1602,2674 v1(1700,2575) 1700,2375 1625,2300 1625,2200 1585,2160 1560,2125 1586,2124 T1.1
  Bottom w16: v1(1700,2575) 1750,2575 1825,2500 1825,2450 2025,2250 2025,2125 2215,1935 2215,1835 2250,1800 2345,1800 2370,1825 3050,1825 3160,1715 3240,1715 3275,1750 3300,1750 v1(3325,1775)
XTAL1: C4.1 R1.1 U1.17 U2.17 Y1.1 | length 529.6
  Top w10: U1.17@2850,1779 U2.17@2850,1879
  Top w12: U2.17@2850,1879 2850,1975 R1.1 2875,2000 2850,2025 2850,2150 2871,2171 2889,2171 2889,2215 C4.1
XTAL2: C3.2 R1.2 U1.16 U2.16 Y1.3 | length 410
  Top w10: U1.16@2870,1779 2870,1833 2882,1845 U2.16@2882,1879
  Top w12: U2.16@2882,1879 2882,1956 R1.2 2951,2016 2951,2069 2962,2080 2962,2085 C3.2
XUSB: F1.2 J1.P1 | length 411.1
  Top w16: J1.P1 1302,2552 1350,2600
  Top w24: 1316,2566 1350,2600 1425,2675 1425,2702 F1.2@1424,2725
pads on no net: EXTPOWER.4 EXTPOWER.5 EXTPOWER.6 EXTPOWER.7 EXTPOWER.8 EXTPOWER.9 FID1.P$1 FID2.P$1 FID3.P$1 J1.1 J3.1 ORIGIN.X RN3.2 RN3.3 RN3.6 RN3.7 U3.4

## Polygon pours and split planes (outlines as drawn)
GND on Top "Top-GND" (solid, remove dead copper, pour order 6): 1022,3078 3803,3078 3803,1065.02 cw(c3760.5,1064.5) 3761.02,1022 1065,1022 cw(c1065,1065) 1022,1065
+5V on Top "Top-+5V" (solid, remove dead copper, pour order 0): 1294,1851.56 cw(c1354.5,1840.5) 1365.56,1901 1611,1901 cw(c1611,1831) 1681,1831 1681,1515.04 cw(c1635.5,1514.5) 1636.04,1469 1390.47,1469 cw(c1377.5,1552.5) 1294,1539.53
GND on Bottom "Bottom-GND" (solid, remove dead copper, pour order 4): 1022,3078 3728,3078 3728,1022 1065,1022 cw(c1065,1065) 1022,1065
+5V on Bottom "Bottom-+5V" (solid, remove dead copper, pour order 2): 1631,1991 cw(c1631,1921) 1701,1921 1701,1539.33 cw(c1643,1552) 1630.33,1494 1290,1494 cw(c1290,1540) 1244,1540 1244,1946.04 cw(c1289.5,1945.5) 1290.04,1991

## Keep-outs
Keep-Out Layer:
  the board outline again, w10

## Other copper
Bottom:
  text "30" at 1825,2600 h42.5
  text "2011-REV3" at 1058,1960 h34 r90

## Silkscreen, mask and mechanical layers (free items; w line width, h text height)
Top Overlay:
  circle w12: c1125,1075 r16
  lines w12: 1025,1050 1075,1050 ; 1050,1025 1050,1075 ; 1075,1075 1125,1075 ; 1125,1035 ccw(c1125,1075) 1165,1075 ; 1125,1115 cw(c1125,1075) 1165,1075 ; 1200,1050 1250,1050 ; 1200,1075 1165,1075 ; 2100,2795 2120,2775 2515,2775 ; 2225,3250 2225,3400 2900,3400 2900,3250 ; 2325,3250 2325,3300 2450,3300 2450,3250 ; 2935,2775 3330,2775 3350,2795 ; 3380,2820 3400,2840 3420,2820 3390,2820 3405,2830 ; 3485,2845 3525,2845 3505,2825 3490,2840 3510,2840 ; 3505,2830 3505,2835 ; 3365,2815 3400,2850 3435,2815 3365,2815 ; 3470,2850 3505,2815 3540,2850 3470,2850
  text "PWM COMPL1" at 2275,3425 h77.5
  text "PWM COMPL2" at 2275,3325 h77.5
  text "(AIN0)" at 2795.96,3288.93 h34 r270.02
  text "SCL" at 1726.38,3256.88 h47.6 r270.02
  text "SDA" at 1836.38,3251.88 h47.6 r270.02
  text "A10" at 2420.98,3203.96 h34 r270.02
  text "A11" at 2220.99,3192.63 h34 r270.02
  text "A9" at 2520.99,3175.64 h34 r270.02
  text "A8" at 2620.99,3175.64 h34 r270.02
  text "A7" at 2895.99,3175.64 h34 r270.02
  text "A6" at 3070.99,3175.64 h34 r270.02
  text "Prototype" at 3759.95,3058.62 h42.5 r0.01
  text "M.Banzi" at 744.21,3036.72 h38.25 r0.01
  text "Limited" at 3831.01,2978.47 h42.5 r0.01
  text "D.Cuartielles" at 524.53,2961.68 h38.25 r0.01
  text "13" at 2110,2930 h42.5 r270
  text "12" at 2210,2930 h42.5 r270
  text "11" at 2310,2930 h42.5 r270
  text "10" at 2410,2930 h42.5 r270
  text "9" at 2510,2930 h42.5 r270
  text "8" at 2610,2930 h42.5 r270
  text "7" at 2770,2930 h42.5 r270
  text "6" at 2870,2930 h42.5 r270
  text "5" at 2970,2930 h42.5 r270
  text "4" at 3070,2930 h42.5 r270
  text "3" at 3170,2930 h42.5 r270
  text "2" at 3270,2930 h42.5 r270
  text "1" at 3370,2930 h42.5 r270
  text "0" at 3470,2930 h42.5 r270
  text "GND" at 2012.38,2917.88 h47.6 r270.02
  text "T.Igoe" at 773.07,2914.47 h38.25 r0.01
  text "AREF" at 1916.36,2914.46 h47.6 r270.02
  text "Edition" at 3780.01,2897.47 h42.5 r0.01
  text "#" at 3192.6,2864.91 h37.4 r270.02
  text "#" at 2522.6,2859.91 h37.4 r270.02
  text "#" at 2887.6,2859.91 h37.4 r270.02
  text "#" at 2987.6,2859.91 h37.4 r270.02
  text "G.Martino" at 664.73,2836.71 h38.25 r0.01
  text "#" at 2127.6,2814.91 h37.4 r270.02
  text "#" at 2327.6,2814.91 h37.4 r270.02
  text "#" at 2422.6,2814.91 h37.4 r270.02
  text "D.Mellis" at 709.34,2771.72 h38.25 r0.01
  text "TX1" at 3382.38,2772.02 h47.6 r270.02
  text "RX1" at 3482.38,2771.02 h47.6 r270.02
  text "DIGITAL" at 2542,2749 h56.1
  text "[#=PWM]" at 2585,2690 h37.4
  text "TM" at 2780,2610 h34
  text "Arduino" at 2295,2550 h73.1
  text "LEONARDO" at 2240,2450 h73.1
  text "www.arduino.cc" at 2181,2373 h56.1
  text "1" at 3487,2254 h42.5
  text "+VIN" at 1025,1500 h42.5
  text "-" at 1600,1470 h42.5
  text "IOREF" at 2181.35,1384.12 h47.6 r270.02
  text "GND" at 2583.38,1297.88 h47.6 r270.02
  text "GND" at 2683.38,1297.88 h47.6 r270.02
  text "RST" at 2281.38,1296.88 h47.6 r270.02
  text "3V3" at 2381.38,1296.88 h47.6 r270.02
  text "VIN" at 2783.38,1289.95 h47.6 r270.02
  text "5V" at 2483.39,1250.29 h47.6 r270.02
  text "ANALOG IN" at 2990,1240 h56.1
  text "A0" at 2969,1171 h34
  text "A1" at 3069,1171 h34
  text "A2" at 3169,1171 h34
  text "A3" at 3269,1171 h34
  text "A4" at 3369,1171 h34
  text "A5" at 3469,1171 h34
Bottom Overlay:
  text "MADE IN" at 3150,2750 h86.8
  text "ITALY" at 3100,2675 h86.8
ReferenceLC:
  text "X2" at 1005,1390 h42.5
Unrouted:
  lines w0: 1625,1675 1772,1675

## Text inside footprints (layer, text, board x,y; h text height)
IC1: Top Overlay "2" at 1820.39,1624.24 h49.6 r90.02; Top Overlay "1" at 1820.04,1539.12 h49.6 r90.02; Top Overlay "4" at 1549.98,1749.97 h49.6 r90.02; Top Overlay "3" at 1819.99,1716.05 h49.6 r90.02
J1: Top Overlay "PCB" at 1007.01,2310 h62 r270